# Altium PCB BAT 80 LF105-12.PcbDoc
Units mm, origin at the board's own origin, x right, y up, seen from the top; angles counter-clockwise.
Board outline 461.59 x 107.96 mm, 4 copper layers (Top Layer, Layer 1, Layer 2, Bottom Layer); 24 components, 21 nets, 103 pads, 1515 vias.
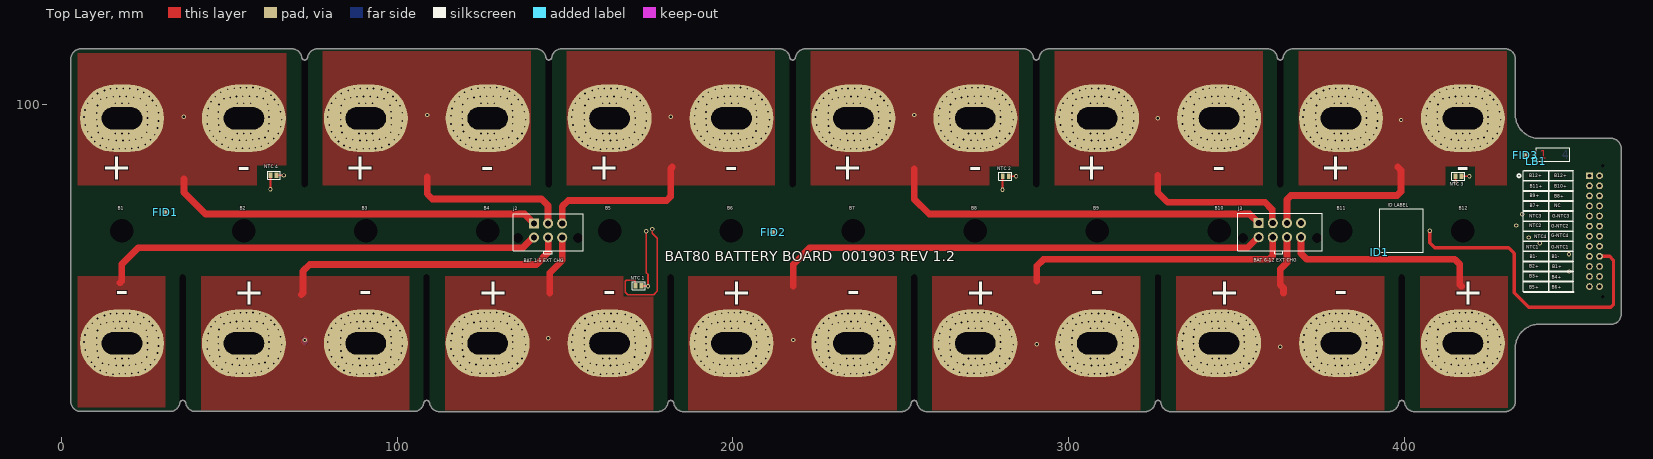
[diagram p0: Top Layer view]
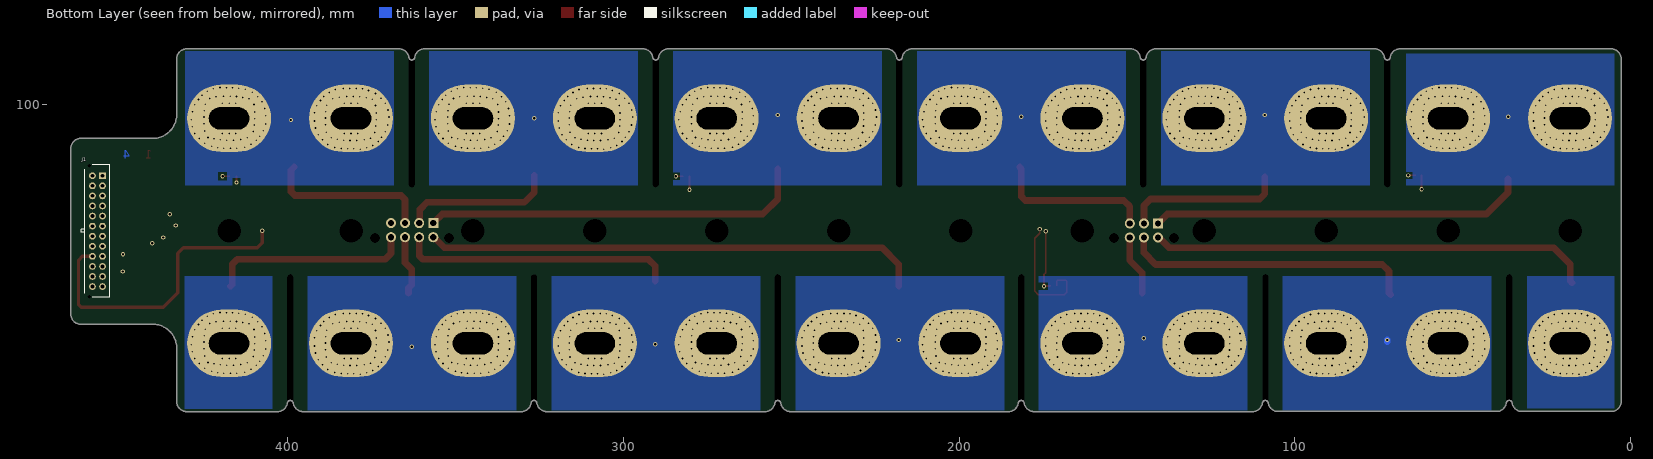
[diagram p1: Bottom Layer view, seen from below]
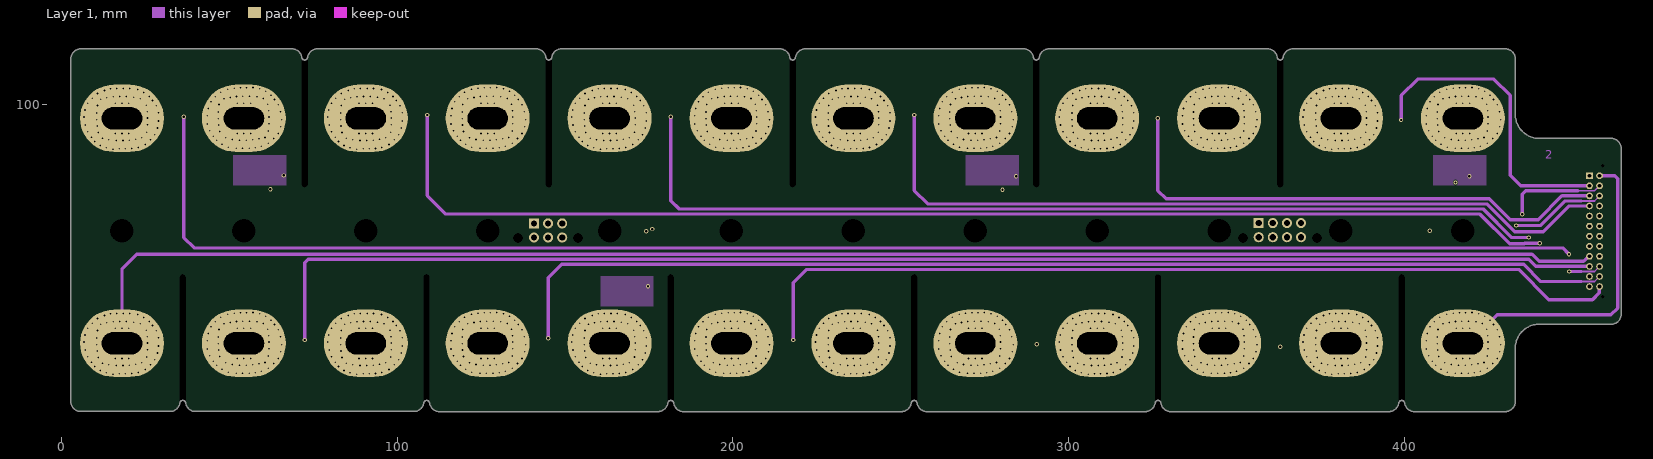
[diagram p2: Layer 1]
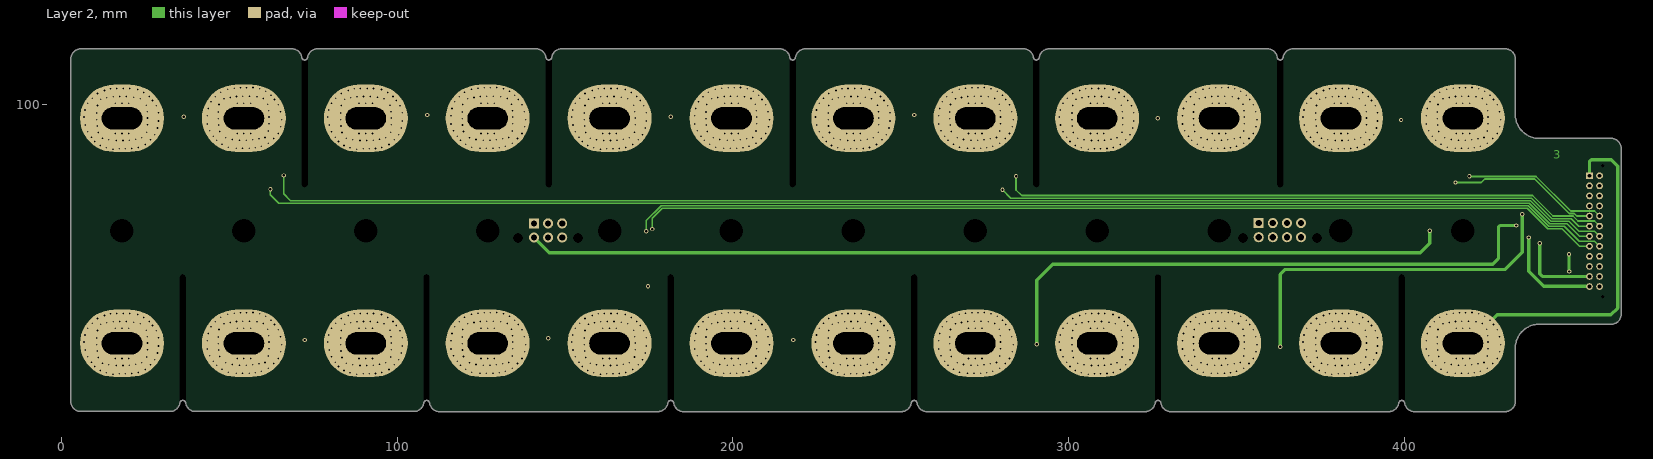
[diagram p3: Layer 2]

## Layer stack, top to bottom
Top Solder: solder mask 0.0102, Solder Resist, Dk 3.5
Top Layer: signal copper 0.14
Dielectric 2: prepreg 0.32, PP-006, Dk 4.1
Layer 1: signal copper 0.035
Dielectric 1: dielectric 0.32, FR-4, Dk 4.8
Layer 2: signal copper 0.035
Dielectric 3: prepreg 0.32, PP-006, Dk 4.1
Bottom Layer: signal copper 0.14
Bottom Solder: solder mask 0.0102, Solder Resist, Dk 3.5

## Board outline
5.45,8.7 32.8,8.7 32.806,8.706 ccw(c32.38,11.676) 35.35,11.25 cw(c36.2,11.145) 37.05,11.244 ccw(c40.02,11.67) 39.594,8.7 105.433,8.7 ccw(c105.008,11.67) 107.978,11.244 cw(c108.827,11.139) 109.678,11.238 ccw(c112.647,11.664) 112.222,8.694 178.119,8.694 178.125,8.7 ccw(c177.699,11.67) 180.669,11.244 cw(c181.519,11.139) 182.369,11.238 ccw(c185.339,11.664) 184.913,8.694 250.619,8.694 250.625,8.7 ccw(c250.199,11.67) 253.169,11.244 cw(c254.019,11.139) 254.869,11.238 ccw(c257.839,11.664) 257.413,8.694 323.219,8.694 323.225,8.7 ccw(c322.799,11.67) 325.769,11.244 cw(c326.619,11.139) 327.469,11.238 ccw(c330.439,11.664) 330.013,8.694 395.794,8.694 395.8,8.7 ccw(c395.374,11.67) 398.344,11.244 cw(c399.194,11.139) 400.044,11.238 ccw(c403.014,11.664) 402.588,8.694 430.444,8.694 430.45,8.7 ccw(c430.024,11.67) 432.994,11.244 433,11.244 433,27.5 cw(c440.2,27.5) 440.2,34.7 461.95,34.7 ccw(c461.524,37.67) 464.494,37.244 464.5,37.244 464.5,87.45 ccw(c461.53,87.024) 461.956,89.994 461.956,90 440.2,90 cw(c440.2,97.2) 433,97.2 433,97.1 433,114.1 432.994,114.1 ccw(c430.024,113.674) 430.45,116.644 430.444,116.65 366.4,116.65 ccw(c366.826,113.68) 363.856,114.106 cw(c363.006,114.211) 362.156,114.112 ccw(c359.186,113.686) 359.612,116.656 359.606,116.65 293.775,116.65 ccw(c294.201,113.68) 291.231,114.106 cw(c290.381,114.211) 289.531,114.112 ccw(c286.561,113.686) 286.987,116.656 286.981,116.65 221.2,116.65 ccw(c221.626,113.68) 218.656,114.106 cw(c217.806,114.211) 216.956,114.112 ccw(c213.986,113.686) 214.412,116.656 214.406,116.65 148.6,116.65 ccw(c149.026,113.68) 146.056,114.106 cw(c145.206,114.211) 144.356,114.112 ccw(c141.386,113.686) 141.812,116.656 141.806,116.65 75.9,116.65 ccw(c76.326,113.68) 73.356,114.106 cw(c72.506,114.211) 71.656,114.112 ccw(c68.686,113.686) 69.112,116.656 69.106,116.65 5.45,116.65 ccw(c5.876,113.68) 2.906,114.106 2.906,11.244 ccw(c5.876,11.67)

## Design rules (kind name [scope] priority, off if disabled: settings)
Clearance [All] p1: gap=0.254 ignorepadtopadclearanceinfootprint=FALSE except(0: Arc-Hole Track-Hole SMDPad-Hole THPad-Hole Via-Hole Fill-Hole Poly-Hole Region-Hole Text-Hole; 0.177: Arc-THPad Track-THPad)
ComponentClearance [All] p1: gap=0.177 collisioncheckmode=3 verticalgap=10 showdistances=FALSE
HoleSize [All] p1: absolutevalues=TRUE maxlimit=50 minlimit=0.025 maxpercent=80.000 minpercent=20.000
HoleToHoleClearance [All] p1: gap=0 allowstackedmicrovias=TRUE
NetAntennae [All] p1: netantennaetolerance=10
PolygonConnect [All] p1: connectstyle=Direct reliefconductorwidth=0.254 reliefentries=4 polygonreliefangle="90 Angle" airgapwidth=0.254
RoomDefinition "BAT 80 LF105-12" [InComponentClass('BAT 80 LF105-12')] p1: confinementstyle=ConfineOut formatcopy=TRUE lockcomponents=FALSE outline 493.4,29 561.1,29 561.1,85 493.4,85
RoutingVias [All] p1: holewidth=0.711 width=1.27 viastyle="Through Hole" minholewidth=0.711 minwidth=1.27 maxholewidth=0.711 maxwidth=1.27
SilkToSolderMaskClearance [IsPad] p1: minsilkscreentomaskgap=0.177 clearancetoexposedcopper=TRUE
SolderMaskExpansion [All] p1: expansion=0.102 istentingtop=FALSE
Width [All] p1: maxlimit=5 minlimit=0.254 preferedwidth=1
25 further rules are at their usual default settings.

## Components (designator, comment, footprint, x,y, rotation, side; value= is the part's Value field where it differs from the comment)
B1 "LIBAT" LF105 18.1,62.5 r180 top locked
B2 "LIBAT" LF105 54.4,62.5 r0 top locked
B3 "LIBAT" LF105 90.7,62.5 r180 top locked
B4 "LIBAT" LF105 127,62.5 r0 top locked
B5 "LIBAT" LF105 163.3,62.5 r180 top locked
B6 "LIBAT" LF105 199.6,62.5 r0 top locked
B7 "LIBAT" LF105 235.9,62.5 r180 top locked
B8 "LIBAT" LF105 272.2,62.5 r0 top locked
B9 "LIBAT" LF105 308.5,62.5 r180 top locked
B10 "LIBAT" LF105 344.8,62.5 r0 top locked
B11 "LIBAT" LF105 381.1,62.5 r180 top locked
B12 "LIBAT" LF105 417.4,62.5 r0 top locked
FID1 "PE PAD" FIDUCIAL 31,68 r0 top
FID2 "PE PAD" FIDUCIAL 212,62 r0 top
FID3 "PE PAD" FIDUCIAL 436,85 r0 top
ID1 "PE PAD" QR-FRAME 392.6,56.1 r0 top
J1 "43045-2412" "MICROFIT 24 VER" 455.1,78.9 r90 bottom locked
j2 "462070006" "MINIFIT JR 6 VER" 140.79,64.711 r180 top locked
J3 "462070008" "MINIFIT JR 8 VER" 356.6,64.8 r180 top locked
LB1 "PE PAD" LAYERBOX-4 439.2,83.2 r0 top
"NTC 1" "10k NTC" NTC0805-HC 171.9,46.1 r270 top locked
"NTC 2" "10k NTC" NTC0805-HC 281.25,78.75 r90 top locked
"NTC 3" "10k NTC" NTC0805-HC 416.1,78.75 r90 top locked
"NTC 4" "10k NTC" NTC0805-HC 63.25,79 r270 top locked

## Footprints (in the part's own frame and the unit in brackets; to place one, negate y for a bottom-side part, rotate by r counter-clockwise, add the part's x,y. Pads: shape width x height; smd on the part's side, far side on the other; paste and mask are expansions set on the pad)
FIDUCIAL [mm] "FIDUCIAL MARK"
  round 1.5 smd mask+0.75: 0(0,0.012)
LAYERBOX-4 [mm] "LAYER MARKER BOX 4 LAYER"
  silkscreen extent 0,0 10,4.1
LF105 [mm]
  round 0 hole 7 unplated: 0(0,0)
  oval 25x20 hole 6.6 slot 12 at 0 deg: 1(0,-33.5) 2(0,33.5)
"MICROFIT 24 VER" [mm]
  round 0 hole 1.1 unplated: 0(-36,3.94) 0(3,3.94)
  rect 2x2 hole 1.1: 1(0,0)
  round 2 hole 1.1: 2(-3,0) 3(-6,0) 4(-9,0) 5(-12,0) 6(-15,0) 7(-18,0) 8(-21,0) 9(-24,0) 10(-27,0) 11(-30,0) 12(-33,0) 13(0,3) 14(-3,3) 15(-6,3) 16(-9,3) 17(-12,3) 18(-15,3) 19(-18,3) 20(-21,3) 21(-24,3) 22(-27,3) 23(-30,3) 24(-33,3)
  silkscreen extent -36.25,-2.2 3.33,6.35, body extent -36.58,-2.44 3.57,6.33, height 10.15
"MINIFIT JR 6 VER" [mm] "462070006"
  round 0 hole 3 unplated: 0(-13.11,4.391) 0(4.7,4.391)
  rect 3x3 hole 1.85: 1(0,0)
  round 3 hole 1.85: 2(-4.2,0) 3(-8.4,0) 4(-0.01,4.211) 5(-4.21,4.211) 6(-8.41,4.211)
  silkscreen extent -14.6,-2.8 6.2,9, body extent -14.63,-2.8 6.23,8.2, height 13.8
"MINIFIT JR 8 VER" [mm] "462070008"
  round 0 hole 3 unplated: 0(-17.31,4.391) 0(4.7,4.391)
  rect 3x3 hole 1.85: 1(0,0)
  round 3 hole 1.85: 2(-4.2,0) 3(-8.4,0) 4(-12.6,0) 5(-0.01,4.211) 6(-4.21,4.211) 7(-8.41,4.211) 8(-12.61,4.211)
  silkscreen extent -18.9,-3 6.2,9.1, body extent -18.83,-2.8 6.23,8.2, height 13.8
NTC0805-HC [mm] "HEAVY COPPER FOOTPRINT"
  rect 1.67x1.12 smd paste-0.1 mask-0.1: 1(0,-0.9) 2(0,0.9)
  silkscreen extent -1.2,-1.8 1.2,2, body extent -0.8,-1.05 0.8,1.05, height 1
QR-FRAME [mm]
  round 0 on Top Overlay: 1(0,0)
  silkscreen extent 0,0 13,13

## Part data
B1 B2 B3 B4 B5 B6 B7 B8 B9 B10 B11 B12: library part LI-BATTERY, "LF 105"
J1: library part "Header 12X2A", "MOLEX 43045-2412", Supplier Part Number 1=6700573, LatestRevisionDate=17-Jul-2002, LatestRevisionNote="Re-released for DXP Platform.", Publisher="Altium Limited", Supplier 1=RSComponents
j2: library part "Header 3X2A", "MOLEX 46207-0006", LatestRevisionDate=17-Jul-2002, LatestRevisionNote="Re-released for DXP Platform.", Publisher="Altium Limited"
J3: library part "Header 4X2A", "MOLEX  46207-0008", LatestRevisionDate=17-Jul-2002, LatestRevisionNote="Re-released for DXP Platform.", Publisher="Altium Limited"
"NTC 1" "NTC 2" "NTC 3" "NTC 4": library part "Res Thermal", "Vishay NTCS0805E3103FLT", LatestRevisionDate=04-Mar-2005, LatestRevisionNote="PCB Footprint replaced.", PackageReference=6-0805, Published=24-Mar-1999, Publisher="Altium Limited"

## Free pads (board coordinates)
  round 0 hole 1.75 slot 42 at 90 deg unplated: 0(36.2,28.5) 0(72.5,96.5) 0(108.8,28.5) 0(145.2,96.5) 0(181.5,28.5) 0(217.8,96.5) 0(254,28.5) 0(290.4,96.5) 0(326.6,28.5) 0(363,96.5) 0(399.2,28.5)

## Via types
v1: diameter 1, hole 0.5, Top Layer to Bottom Layer, 1488 vias
v2: diameter 1.27, hole 0.711, Top Layer to Bottom Layer, 27 vias

## Nets (pads, with @x,y where several pads share a name; then routed paths per layer and width w, separated by ;. In a path a pad name is that pad's centre, name@x,y a point inside that pad or via, vN(x,y) a via of type N, cw(c..) or ccw(c..) an arc to the next point about the centre after c; other vN are vias at no path point)
B1+: B1.1 B2.2 J1.22 j2.1 | length 577.5
  Top Layer w2: 36.5,78 36.561,77.939 36.561,73.939 43,67.5 138.001,67.5 j2.1
  Layer 1 w0.5: 452.7,50.4 456.6,50.4 J1.22
  Layer 1 w1: v2(36.5,96.5) 36.5,60.5 39.6,57.4 447.1,57.4 v2(449,55.5) ; v2(449.1,50.4) 452.7,50.4
  Layer 2 w1: v2(449,55.5) 449,50.573 449.1,50.473 v2(449.1,50.4)
  other v1: 15.4,86.8 17.3,86.9 19.1,86.9 21,87 52.1,87.1 54,87.1 56,87.1 13.4,87.2 57.811,87.198 22.9,87.3 49.7,87.4 59.6,87.7 11.6,87.9 25,88.2 47.9,88.3 61.7,88.6 10,89.1 16.4,89.4 18.4,89.4 20.3,89.5 46.3,89.5 53.1,89.5 55.1,89.5 14.2,89.6 26.6,89.6 57,89.6 50.9,89.7 22.2,89.8 58.9,89.9 63.3,90 12.3,90.1 24,90.2 49,90.2 60.7,90.3 9,90.4 45.3,90.7 27.9,91.1 16.1,91.5 18.1,91.5 20.1,91.5 52.4,91.5 54.4,91.5 56.4,91.5 64.6,91.5 11,91.8 25.5,91.9 7.9,92 47.2,92.1 61.7,92.2 44.2,92.3 28.7,93.1 65.4,93.5 10.7,93.7 7.2,94 46.9,94 25.7,94.1 43.5,94.3 61.9,94.4 29,95.2 10.6,95.6 65.7,95.6 46.8,95.9 25.7,96.1 6.8,96.4 61.9,96.4 43.5,96.8 10.6,97.6 29,97.7 46.8,97.9 25.6,98 65.3,98 61.8,98.3 7.1,98.5 43.8,98.9 28.3,99.7 10.8,99.8 25.3,99.9 64.6,100 47,100.1 61.5,100.2 7.9,100.5 16.1,100.5 18.1,100.5 20.1,100.5 52.4,100.5 54.4,100.5 56.4,100.5 44.6,100.9 27.2,101.3 63.5,101.6 11.8,101.7 23.5,101.8 48.5,101.8 60.2,101.9 9.2,102 13.6,102.1 50.3,102.2 21.6,102.3 15.5,102.4 45.9,102.4 58.3,102.4 17.4,102.5 19.4,102.5 26.2,102.5 52.2,102.5 54.1,102.6 56.1,102.6 62.5,102.9 10.8,103.4 24.6,103.7 47.5,103.8 60.9,104.1 12.9,104.3 22.8,104.6 49.6,104.7 14.689,104.802 59.1,104.8 16.5,104.9 18.5,104.9 20.4,104.9 51.5,105 53.4,105.1 55.2,105.1 57.1,105.2
B1-: B1.2 J1.9 J1.21 j2.4 | length 959
  Top Layer w1: v2(407.5,62.5) 407.5,59 409,57.5 431,57.5 432.75,55.75 432.75,44 437,39.75 461.5,39.75 462.25,40.5 462.25,53.75 461.1,54.9 J1.21
  Top Layer w2: 17.5,47 18,47.5 18,52.5 23,57.5 137.529,57.5 140.529,60.5 j2.4
  Layer 1 w1: B1.2 v1(18.1,33.5) 18.1,51.1 22.5,55.5 438,55.5 440.1,53.4 453.329,53.4 454.829,54.9 J1.9
  Layer 2 w1: j2.4 145.3,56 404.75,56 407.5,58.75 v2(407.5,62.5)
  other v1: 15.4,19.8 17.3,19.9 19.1,19.9 21,20 13.4,20.2 22.9,20.3 11.6,20.9 25,21.2 10,22.1 16.4,22.4 18.4,22.4 20.3,22.5 14.2,22.6 26.6,22.6 22.2,22.8 12.3,23.1 24,23.2 9,23.4 27.9,24.1 16.1,24.5 18.1,24.5 20.1,24.5 11,24.8 25.5,24.9 7.9,25 28.7,26.1 10.7,26.7 7.2,27 25.7,27.1 29,28.2 10.6,28.6 25.7,29.1 6.8,29.4 10.6,30.6 29,30.7 25.6,31 7.1,31.5 28.3,32.7 10.8,32.8 25.3,32.9 7.9,33.5 16.1,33.5 20.1,33.5 27.2,34.3 11.8,34.7 23.5,34.8 9.2,35 13.6,35.1 21.6,35.3 15.5,35.4 17.4,35.5 19.4,35.5 26.2,35.5 10.8,36.4 24.6,36.7 12.9,37.3 22.8,37.6 14.689,37.802 16.5,37.9 18.5,37.9 20.4,37.9
B2+: B2.1 B3.2 J1.10 j2.5 | length 494.4
  Top Layer w2: 71.5,43.5 72,44 72,50.5 74,52.5 141.5,52.5 145,56 j2.5
  Layer 1 w1: v2(72.5,30) 72.5,53 73.5,54 437,54 439.1,51.9 J1.10
  Bottom Layer w2: v2@72.5,29.5 v2(72.5,30)
  other v1: 88,19.8 89.9,19.9 91.7,19.9 93.6,20 52.1,20.1 54,20.1 56,20.1 57.811,20.198 86,20.2 95.5,20.3 49.7,20.4 59.6,20.7 84.2,20.9 97.6,21.2 47.9,21.3 61.7,21.6 82.6,22.1 89,22.4 91,22.4 46.3,22.5 53.1,22.5 55.1,22.5 92.9,22.5 57,22.6 86.8,22.6 99.2,22.6 50.9,22.7 94.8,22.8 58.9,22.9 63.3,23 84.9,23.1 49,23.2 96.6,23.2 60.7,23.3 81.6,23.4 45.3,23.7 100.5,24.1 52.4,24.5 54.4,24.5 56.4,24.5 64.6,24.5 88.7,24.5 90.7,24.5 92.7,24.5 83.6,24.8 98.1,24.9 80.5,25 47.2,25.1 61.7,25.2 44.2,25.3 101.3,26.1 65.4,26.5 83.3,26.7 46.9,27 79.8,27 98.3,27.1 43.5,27.3 61.9,27.4 101.6,28.2 65.7,28.6 83.2,28.6 46.8,28.9 98.3,29.1 61.9,29.4 79.4,29.4 43.5,29.8 83.2,30.6 101.6,30.7 46.8,30.9 65.3,31 98.2,31 61.8,31.3 79.7,31.5 43.8,31.9 100.9,32.7 83.4,32.8 97.9,32.9 64.6,33 47,33.1 61.5,33.2 52.4,33.5 54.4,33.5 56.4,33.5 80.5,33.5 88.7,33.5 90.7,33.5 92.7,33.5 44.6,33.9 99.8,34.3 63.5,34.6 84.4,34.7 48.5,34.8 96.1,34.8 60.2,34.9 81.8,35 86.2,35.1 50.3,35.2 94.2,35.3 45.9,35.4 58.3,35.4 88.1,35.4 52.2,35.5 90,35.5 92,35.5 98.8,35.5 54.1,35.6 56.1,35.6 62.5,35.9 83.4,36.4 97.2,36.7 47.5,36.8 60.9,37.1 85.5,37.3 95.4,37.6 49.6,37.7 59.1,37.8 87.289,37.802 89.1,37.9 91.1,37.9 93,37.9 51.5,38 53.4,38.1 55.2,38.1 57.1,38.2
B3+: B3.1 B4.2 J1.11 j2.2 | length 433.2
  Top Layer w2: 109,78.5 109,73.5 110.5,72 143,72 144.99,70.01 j2.2
  Layer 1 w1: v2(109,97) 109,73 114.5,67.5 422.5,67.5 431.3,58.7 435.719,58.7 435.808,58.789 v2(440.3,58.789)
  Layer 2 w1: v2(440.3,58.789) 440.3,49.7 441.1,48.9 J1.11
  other v1: 88,86.8 89.9,86.9 91.7,86.9 93.6,87 124.7,87.1 126.6,87.1 128.6,87.1 86,87.2 130.411,87.198 95.5,87.3 122.3,87.4 132.2,87.7 84.2,87.9 97.6,88.2 120.5,88.3 134.3,88.6 82.6,89.1 89,89.4 91,89.4 92.9,89.5 118.9,89.5 125.7,89.5 127.7,89.5 86.8,89.6 99.2,89.6 129.6,89.6 123.5,89.7 94.8,89.8 131.5,89.9 135.9,90 84.9,90.1 96.6,90.2 121.6,90.2 133.3,90.3 81.6,90.4 117.9,90.7 100.5,91.1 88.7,91.5 90.7,91.5 92.7,91.5 125,91.5 127,91.5 129,91.5 137.2,91.5 83.6,91.8 98.1,91.9 80.5,92 119.8,92.1 134.3,92.2 116.8,92.3 101.3,93.1 138,93.5 83.3,93.7 79.8,94 119.5,94 98.3,94.1 116.1,94.3 134.5,94.4 101.6,95.2 83.2,95.6 138.3,95.6 119.4,95.9 98.3,96.1 79.4,96.4 134.5,96.4 116.1,96.8 83.2,97.6 101.6,97.7 119.4,97.9 98.2,98 137.9,98 134.4,98.3 79.7,98.5 116.4,98.9 100.9,99.7 83.4,99.8 97.9,99.9 137.2,100 119.6,100.1 134.1,100.2 80.5,100.5 88.7,100.5 90.7,100.5 92.7,100.5 125,100.5 127,100.5 129,100.5 117.2,100.9 99.8,101.3 136.1,101.6 84.4,101.7 96.1,101.8 121.1,101.8 132.8,101.9 81.8,102 86.2,102.1 122.9,102.2 94.2,102.3 88.1,102.4 118.5,102.4 130.9,102.4 90,102.5 92,102.5 98.8,102.5 124.8,102.5 126.7,102.6 128.7,102.6 135.1,102.9 83.4,103.4 97.2,103.7 120.1,103.8 133.5,104.1 85.5,104.3 95.4,104.6 122.2,104.7 87.289,104.802 131.7,104.8 89.1,104.9 91.1,104.9 93,104.9 124.1,105 126,105.1 127.8,105.1 129.7,105.2
B4+: B4.1 B5.2 J1.23 j2.6 | length 353.5
  Top Layer w2: 145.5,44 145.5,50 149.2,53.7 j2.6
  Layer 1 w0.5: 452.7,47.4 456.6,47.4 J1.23
  Layer 1 w1: v2(145,30.5) 145,48.5 149,52.5 435.5,52.5 440.6,47.4 452.7,47.4
  other v1: 160.6,19.8 162.5,19.9 164.3,19.9 166.2,20 124.7,20.1 126.6,20.1 128.6,20.1 130.411,20.198 158.6,20.2 168.1,20.3 122.3,20.4 132.2,20.7 156.8,20.9 170.2,21.2 120.5,21.3 134.3,21.6 155.2,22.1 161.6,22.4 163.6,22.4 118.9,22.5 125.7,22.5 127.7,22.5 165.5,22.5 129.6,22.6 159.4,22.6 171.8,22.6 123.5,22.7 167.4,22.8 131.5,22.9 135.9,23 157.5,23.1 121.6,23.2 169.2,23.2 133.3,23.3 154.2,23.4 117.9,23.7 173.1,24.1 125,24.5 127,24.5 129,24.5 137.2,24.5 161.3,24.5 163.3,24.5 165.3,24.5 156.2,24.8 170.7,24.9 153.1,25 119.8,25.1 134.3,25.2 116.8,25.3 173.9,26.1 138,26.5 155.9,26.7 119.5,27 152.4,27 170.9,27.1 116.1,27.3 134.5,27.4 174.2,28.2 138.3,28.6 155.8,28.6 119.4,28.9 170.9,29.1 134.5,29.4 152,29.4 116.1,29.8 155.8,30.6 174.2,30.7 119.4,30.9 137.9,31 170.8,31 134.4,31.3 152.3,31.5 116.4,31.9 173.5,32.7 156,32.8 170.5,32.9 137.2,33 119.6,33.1 134.1,33.2 125,33.5 127,33.5 129,33.5 153.1,33.5 161.3,33.5 163.3,33.5 165.3,33.5 117.2,33.9 172.4,34.3 136.1,34.6 157,34.7 121.1,34.8 168.7,34.8 132.8,34.9 154.4,35 158.8,35.1 122.9,35.2 166.8,35.3 118.5,35.4 130.9,35.4 160.7,35.4 124.8,35.5 162.6,35.5 164.6,35.5 171.4,35.5 126.7,35.6 128.7,35.6 135.1,35.9 156,36.4 169.8,36.7 120.1,36.8 133.5,37.1 158.1,37.3 168,37.6 122.2,37.7 131.7,37.8 159.889,37.802 161.7,37.9 163.7,37.9 165.6,37.9 124.1,38 126,38.1 127.8,38.1 129.7,38.2
B5+: B5.1 B6.2 J1.12 j2.3 | length 362.6
  Top Layer w2: j2.3 149.19,69.69 151,71.5 180.328,71.5 181.5,72.672 181.5,81 182,81.5
  Layer 1 w1: v2(181.5,96.5) 181.5,71.5 184,69 423.5,69 432,60.5 v2(437,60.5)
  Layer 2 w1: v2(437,60.5) 437,50.5 441.5,46 455,46 J1.12
  other v1: 160.6,86.8 162.5,86.9 164.3,86.9 166.2,87 197.3,87.1 199.2,87.1 201.2,87.1 158.6,87.2 203.011,87.198 168.1,87.3 194.9,87.4 204.8,87.7 156.8,87.9 170.2,88.2 193.1,88.3 206.9,88.6 155.2,89.1 161.6,89.4 163.6,89.4 165.5,89.5 191.5,89.5 198.3,89.5 200.3,89.5 159.4,89.6 171.8,89.6 202.2,89.6 196.1,89.7 167.4,89.8 204.1,89.9 208.5,90 157.5,90.1 169.2,90.2 194.2,90.2 205.9,90.3 154.2,90.4 190.5,90.7 173.1,91.1 161.3,91.5 163.3,91.5 165.3,91.5 197.6,91.5 199.6,91.5 201.6,91.5 209.8,91.5 156.2,91.8 170.7,91.9 153.1,92 192.4,92.1 206.9,92.2 189.4,92.3 173.9,93.1 210.6,93.5 155.9,93.7 152.4,94 192.1,94 170.9,94.1 188.7,94.3 207.1,94.4 174.2,95.2 155.8,95.6 210.9,95.6 192,95.9 170.9,96.1 152,96.4 207.1,96.4 188.7,96.8 155.8,97.6 174.2,97.7 192,97.9 170.8,98 210.5,98 207,98.3 152.3,98.5 189,98.9 173.5,99.7 156,99.8 170.5,99.9 209.8,100 192.2,100.1 206.7,100.2 153.1,100.5 161.3,100.5 163.3,100.5 165.3,100.5 197.6,100.5 199.6,100.5 201.6,100.5 189.8,100.9 172.4,101.3 208.7,101.6 157,101.7 168.7,101.8 193.7,101.8 205.4,101.9 154.4,102 158.8,102.1 195.5,102.2 166.8,102.3 160.7,102.4 191.1,102.4 203.5,102.4 162.6,102.5 164.6,102.5 171.4,102.5 197.4,102.5 199.3,102.6 201.3,102.6 207.7,102.9 156,103.4 169.8,103.7 192.7,103.8 206.1,104.1 158.1,104.3 168,104.6 194.8,104.7 159.889,104.802 204.3,104.8 161.7,104.9 163.7,104.9 165.6,104.9 196.7,105 198.6,105.1 200.4,105.1 202.3,105.2
B6+: B6.1 B7.2 J1.24 J3.5 | length 413.6
  Top Layer w2: 218,46 218,52.5 223,57.5 353.335,57.5 356.425,60.589 J3.5
  Layer 1 w1: v2(218,30) 218,47 222,51 434,51 443,42 456,42 458,44 458,45.8 J1.24
  other v1: 233.2,19.8 235.1,19.9 236.9,19.9 238.8,20 197.3,20.1 199.2,20.1 201.2,20.1 203.011,20.198 231.2,20.2 240.7,20.3 194.9,20.4 204.8,20.7 229.4,20.9 242.8,21.2 193.1,21.3 206.9,21.6 227.8,22.1 234.2,22.4 236.2,22.4 191.5,22.5 198.3,22.5 200.3,22.5 238.1,22.5 202.2,22.6 232,22.6 244.4,22.6 196.1,22.7 240,22.8 204.1,22.9 208.5,23 230.1,23.1 194.2,23.2 241.8,23.2 205.9,23.3 226.8,23.4 190.5,23.7 245.7,24.1 197.6,24.5 199.6,24.5 201.6,24.5 209.8,24.5 233.9,24.5 235.9,24.5 237.9,24.5 228.8,24.8 243.3,24.9 225.7,25 192.4,25.1 206.9,25.2 189.4,25.3 246.5,26.1 210.6,26.5 228.5,26.7 192.1,27 225,27 243.5,27.1 188.7,27.3 207.1,27.4 246.8,28.2 210.9,28.6 228.4,28.6 192,28.9 243.5,29.1 207.1,29.4 224.6,29.4 188.7,29.8 228.4,30.6 246.8,30.7 192,30.9 210.5,31 243.4,31 207,31.3 224.9,31.5 189,31.9 246.1,32.7 228.6,32.8 243.1,32.9 209.8,33 192.2,33.1 206.7,33.2 197.6,33.5 199.6,33.5 201.6,33.5 225.7,33.5 233.9,33.5 235.9,33.5 237.9,33.5 189.8,33.9 245,34.3 208.7,34.6 229.6,34.7 193.7,34.8 241.3,34.8 205.4,34.9 227,35 231.4,35.1 195.5,35.2 239.4,35.3 191.1,35.4 203.5,35.4 233.3,35.4 197.4,35.5 235.2,35.5 237.2,35.5 244,35.5 199.3,35.6 201.3,35.6 207.7,35.9 228.6,36.4 242.4,36.7 192.7,36.8 206.1,37.1 230.7,37.3 240.6,37.6 194.8,37.7 204.3,37.8 232.489,37.802 234.3,37.9 236.3,37.9 238.2,37.9 196.7,38 198.6,38.1 200.4,38.1 202.3,38.2
B7+: B7.1 B8.2 J1.4 J3.1 | length 346.5
  Top Layer w2: 254,81 254,72 258.5,67.5 353.9,67.5 J3.1
  Layer 1 w1: v2(254,97) 254,74.5 258,70.5 424.5,70.5 432.8,62.2 441.4,62.2 449.1,69.9 J1.4
  other v1: 233.2,86.8 235.1,86.9 236.9,86.9 238.8,87 269.9,87.1 271.8,87.1 273.8,87.1 231.2,87.2 275.611,87.198 240.7,87.3 267.5,87.4 277.4,87.7 229.4,87.9 242.8,88.2 265.7,88.3 279.5,88.6 227.8,89.1 234.2,89.4 236.2,89.4 238.1,89.5 264.1,89.5 270.9,89.5 272.9,89.5 232,89.6 244.4,89.6 274.8,89.6 268.7,89.7 240,89.8 276.7,89.9 281.1,90 230.1,90.1 241.8,90.2 266.8,90.2 278.5,90.3 226.8,90.4 263.1,90.7 245.7,91.1 233.9,91.5 235.9,91.5 237.9,91.5 270.2,91.5 272.2,91.5 274.2,91.5 282.4,91.5 228.8,91.8 243.3,91.9 225.7,92 265,92.1 279.5,92.2 262,92.3 246.5,93.1 283.2,93.5 228.5,93.7 225,94 264.7,94 243.5,94.1 261.3,94.3 279.7,94.4 246.8,95.2 228.4,95.6 283.5,95.6 264.6,95.9 243.5,96.1 224.6,96.4 279.7,96.4 261.3,96.8 228.4,97.6 246.8,97.7 264.6,97.9 243.4,98 283.1,98 279.6,98.3 224.9,98.5 261.6,98.9 246.1,99.7 228.6,99.8 243.1,99.9 282.4,100 264.8,100.1 279.3,100.2 225.7,100.5 233.9,100.5 235.9,100.5 237.9,100.5 270.2,100.5 272.2,100.5 274.2,100.5 262.4,100.9 245,101.3 281.3,101.6 229.6,101.7 241.3,101.8 266.3,101.8 278,101.9 227,102 231.4,102.1 268.1,102.2 239.4,102.3 233.3,102.4 263.7,102.4 276.1,102.4 235.2,102.5 237.2,102.5 244,102.5 270,102.5 271.9,102.6 273.9,102.6 280.3,102.9 228.6,103.4 242.4,103.7 265.3,103.8 278.7,104.1 230.7,104.3 240.6,104.6 267.4,104.7 232.489,104.802 276.9,104.8 234.3,104.9 236.3,104.9 238.2,104.9 269.3,105 271.2,105.1 273,105.1 274.9,105.2
B8+: B8.1 B9.2 J1.15 J3.6 | length 284
  Top Layer w2: 290.5,47.5 290.5,52 292.5,54 359.638,54 360.81,55.172 J3.6
  Layer 1 w0.5: 452.7,71.4 456.6,71.4 J1.15
  Layer 1 w1: v2(433.3,64.1) 440.6,64.1 447.9,71.4 452.7,71.4
  Layer 2 w1: v2(290.5,28.75) 290.5,47.75 295.25,52.5 426.25,52.5 428,54.25 428,63.514 428.586,64.1 v2(433.3,64.1)
  other v1: 305.8,19.8 307.7,19.9 309.5,19.9 311.4,20 269.9,20.1 271.8,20.1 273.8,20.1 275.611,20.198 303.8,20.2 313.3,20.3 267.5,20.4 277.4,20.7 302,20.9 315.4,21.2 265.7,21.3 279.5,21.6 300.4,22.1 306.8,22.4 308.8,22.4 264.1,22.5 270.9,22.5 272.9,22.5 310.7,22.5 274.8,22.6 304.6,22.6 317,22.6 268.7,22.7 312.6,22.8 276.7,22.9 281.1,23 302.7,23.1 266.8,23.2 314.4,23.2 278.5,23.3 299.4,23.4 263.1,23.7 318.3,24.1 270.2,24.5 272.2,24.5 274.2,24.5 282.4,24.5 306.5,24.5 308.5,24.5 310.5,24.5 301.4,24.8 315.9,24.9 298.3,25 265,25.1 279.5,25.2 262,25.3 319.1,26.1 283.2,26.5 301.1,26.7 264.7,27 297.6,27 316.1,27.1 261.3,27.3 279.7,27.4 319.4,28.2 283.5,28.6 301,28.6 264.6,28.9 316.1,29.1 279.7,29.4 297.2,29.4 261.3,29.8 301,30.6 319.4,30.7 264.6,30.9 283.1,31 316,31 279.6,31.3 297.5,31.5 261.6,31.9 318.7,32.7 301.2,32.8 315.7,32.9 282.4,33 264.8,33.1 279.3,33.2 270.2,33.5 272.2,33.5 274.2,33.5 298.3,33.5 306.5,33.5 308.5,33.5 310.5,33.5 262.4,33.9 317.6,34.3 281.3,34.6 302.2,34.7 266.3,34.8 313.9,34.8 278,34.9 299.6,35 304,35.1 268.1,35.2 312,35.3 263.7,35.4 276.1,35.4 305.9,35.4 270,35.5 307.8,35.5 309.8,35.5 316.6,35.5 271.9,35.6 273.9,35.6 280.3,35.9 301.2,36.4 315,36.7 265.3,36.8 278.7,37.1 303.3,37.3 313.2,37.6 267.4,37.7 276.9,37.8 305.089,37.802 306.9,37.9 308.9,37.9 310.8,37.9 269.3,38 271.2,38.1 273,38.1 274.9,38.2
B9+: B9.1 B10.2 J1.3 J3.2 | length 202
  Top Layer w2: 326.5,79 326.5,74 329.5,71 358.5,71 360.609,68.891 360.609,64.991 J3.2
  Layer 1 w1: v2(326.5,96) 326.5,74.5 329,72 425.25,72 431.45,65.8 439.8,65.8 446.9,72.9 J1.3
  other v1: 305.8,86.8 307.7,86.9 309.5,86.9 311.4,87 342.5,87.1 344.4,87.1 346.4,87.1 303.8,87.2 348.211,87.198 313.3,87.3 340.1,87.4 350,87.7 302,87.9 315.4,88.2 338.3,88.3 352.1,88.6 300.4,89.1 306.8,89.4 308.8,89.4 310.7,89.5 336.7,89.5 343.5,89.5 345.5,89.5 304.6,89.6 317,89.6 347.4,89.6 341.3,89.7 312.6,89.8 349.3,89.9 353.7,90 302.7,90.1 314.4,90.2 339.4,90.2 351.1,90.3 299.4,90.4 335.7,90.7 318.3,91.1 306.5,91.5 308.5,91.5 310.5,91.5 342.8,91.5 344.8,91.5 346.8,91.5 355,91.5 301.4,91.8 315.9,91.9 298.3,92 337.6,92.1 352.1,92.2 334.6,92.3 319.1,93.1 355.8,93.5 301.1,93.7 297.6,94 337.3,94 316.1,94.1 333.9,94.3 352.3,94.4 319.4,95.2 301,95.6 356.1,95.6 337.2,95.9 316.1,96.1 297.2,96.4 352.3,96.4 333.9,96.8 301,97.6 319.4,97.7 337.2,97.9 316,98 355.7,98 352.2,98.3 297.5,98.5 334.2,98.9 318.7,99.7 301.2,99.8 315.7,99.9 355,100 337.4,100.1 351.9,100.2 298.3,100.5 306.5,100.5 308.5,100.5 310.5,100.5 342.8,100.5 344.8,100.5 346.8,100.5 335,100.9 317.6,101.3 353.9,101.6 302.2,101.7 313.9,101.8 338.9,101.8 350.6,101.9 299.6,102 304,102.1 340.7,102.2 312,102.3 305.9,102.4 336.3,102.4 348.7,102.4 307.8,102.5 309.8,102.5 316.6,102.5 342.6,102.5 344.5,102.6 346.5,102.6 352.9,102.9 301.2,103.4 315,103.7 337.9,103.8 351.3,104.1 303.3,104.3 313.2,104.6 340,104.7 305.089,104.802 349.5,104.8 306.9,104.9 308.9,104.9 310.8,104.9 341.9,105 343.8,105.1 345.6,105.1 347.5,105.2
B10+: B10.1 B11.2 J1.14 J3.7 | length 155.5
  Top Layer w2: 364,44 364,45.5 363,46.5 363,51 365.01,53.01 J3.7
  Layer 1 w0.5: 451.6,74.4 456.6,74.4 J1.14
  Layer 1 w1: v2(435.1,67.4) 435.1,73.35 436.15,74.4 451.6,74.4
  Layer 2 w1: v2(363,28) 363,49.5 364.5,51 430,51 435.1,56.1 v2(435.1,67.4)
  other v1: 378.4,19.8 380.3,19.9 382.1,19.9 384,20 342.5,20.1 344.4,20.1 346.4,20.1 348.211,20.198 376.4,20.2 385.9,20.3 340.1,20.4 350,20.7 374.6,20.9 388,21.2 338.3,21.3 352.1,21.6 373,22.1 379.4,22.4 381.4,22.4 336.7,22.5 343.5,22.5 345.5,22.5 383.3,22.5 347.4,22.6 377.2,22.6 389.6,22.6 341.3,22.7 385.2,22.8 349.3,22.9 353.7,23 375.3,23.1 339.4,23.2 387,23.2 351.1,23.3 372,23.4 335.7,23.7 390.9,24.1 342.8,24.5 344.8,24.5 346.8,24.5 355,24.5 379.1,24.5 381.1,24.5 383.1,24.5 374,24.8 388.5,24.9 370.9,25 337.6,25.1 352.1,25.2 334.6,25.3 391.7,26.1 355.8,26.5 373.7,26.7 337.3,27 370.2,27 388.7,27.1 333.9,27.3 352.3,27.4 392,28.2 356.1,28.6 373.6,28.6 337.2,28.9 388.7,29.1 352.3,29.4 369.8,29.4 333.9,29.8 373.6,30.6 392,30.7 337.2,30.9 355.7,31 388.6,31 352.2,31.3 370.1,31.5 334.2,31.9 391.3,32.7 373.8,32.8 388.3,32.9 355,33 337.4,33.1 351.9,33.2 342.8,33.5 344.8,33.5 346.8,33.5 370.9,33.5 379.1,33.5 381.1,33.5 383.1,33.5 335,33.9 390.2,34.3 353.9,34.6 374.8,34.7 338.9,34.8 386.5,34.8 350.6,34.9 372.2,35 376.6,35.1 340.7,35.2 384.6,35.3 336.3,35.4 348.7,35.4 378.5,35.4 342.6,35.5 380.4,35.5 382.4,35.5 389.2,35.5 344.5,35.6 346.5,35.6 352.9,35.9 373.8,36.4 387.6,36.7 337.9,36.8 351.3,37.1 375.9,37.3 385.8,37.6 340,37.7 349.5,37.8 377.689,37.802 379.5,37.9 381.5,37.9 383.4,37.9 341.9,38 343.8,38.1 345.6,38.1 347.5,38.2
B11+: B11.1 B12.2 J1.2 J3.3 | length 142.3
  Top Layer w2: J3.3 365,71.828 366.172,73 397.828,73 399,74.172 399,80.5 398,81.5
  Layer 1 w1: v2(399,95.5) 399,102.8 403.9,107.7 426.6,107.7 431.5,102.8 431.5,79 434.6,75.9 J1.2
  other v1: 378.4,86.8 380.3,86.9 382.1,86.9 384,87 415.1,87.1 417,87.1 419,87.1 376.4,87.2 420.811,87.198 385.9,87.3 412.7,87.4 422.6,87.7 374.6,87.9 388,88.2 410.9,88.3 424.7,88.6 373,89.1 379.4,89.4 381.4,89.4 383.3,89.5 409.3,89.5 416.1,89.5 418.1,89.5 377.2,89.6 389.6,89.6 420,89.6 413.9,89.7 385.2,89.8 421.9,89.9 426.3,90 375.3,90.1 387,90.2 412,90.2 423.7,90.3 372,90.4 408.3,90.7 390.9,91.1 379.1,91.5 381.1,91.5 383.1,91.5 415.4,91.5 417.4,91.5 419.4,91.5 427.6,91.5 374,91.8 388.5,91.9 370.9,92 410.2,92.1 424.7,92.2 407.2,92.3 391.7,93.1 428.4,93.5 373.7,93.7 370.2,94 409.9,94 388.7,94.1 406.5,94.3 424.9,94.4 392,95.2 373.6,95.6 428.7,95.6 409.8,95.9 388.7,96.1 369.8,96.4 424.9,96.4 406.5,96.8 373.6,97.6 392,97.7 409.8,97.9 388.6,98 428.3,98 424.8,98.3 370.1,98.5 406.8,98.9 391.3,99.7 373.8,99.8 388.3,99.9 427.6,100 410,100.1 424.5,100.2 370.9,100.5 379.1,100.5 381.1,100.5 383.1,100.5 415.4,100.5 417.4,100.5 419.4,100.5 407.6,100.9 390.2,101.3 426.5,101.6 374.8,101.7 386.5,101.8 411.5,101.8 423.2,101.9 372.2,102 376.6,102.1 413.3,102.2 384.6,102.3 378.5,102.4 408.9,102.4 421.3,102.4 380.4,102.5 382.4,102.5 389.2,102.5 415.2,102.5 417.1,102.6 419.1,102.6 425.5,102.9 373.8,103.4 387.6,103.7 410.5,103.8 423.9,104.1 375.9,104.3 385.8,104.6 412.6,104.7 377.689,104.802 422.1,104.8 379.5,104.9 381.5,104.9 383.4,104.9 414.5,105 416.4,105.1 418.2,105.1 420.1,105.2
B12+: B12.1 J1.1 J1.13 J3.8 | length 250
  Top Layer w2: J3.8 369.21,55.79 371,54 415,54 416.5,52.5 416.5,46.5 417,46
  Layer 1 w1: B12.1@425.763,35.637 427.627,37.5 461.5,37.5 463.5,39.5 463.5,78 462.6,78.9 J1.13
  Layer 2 w1: B12.1 419.127,29 427.627,37.5 461.5,37.5 463.5,39.5 463.5,81.675 461.55,83.625 455.686,83.625 455.1,83.039 J1.1
  other v1: 415.1,20.1 417,20.1 419,20.1 420.811,20.198 412.7,20.4 422.6,20.7 410.9,21.3 424.7,21.6 409.3,22.5 416.1,22.5 418.1,22.5 420,22.6 413.9,22.7 421.9,22.9 426.3,23 412,23.2 423.7,23.3 408.3,23.7 415.4,24.5 417.4,24.5 419.4,24.5 427.6,24.5 410.2,25.1 424.7,25.2 407.2,25.3 428.4,26.5 409.9,27 406.5,27.3 424.9,27.4 428.7,28.6 409.8,28.9 424.9,29.4 406.5,29.8 409.8,30.9 428.3,31 424.8,31.3 406.8,31.9 427.6,33 410,33.1 424.5,33.2 415.4,33.5 417.4,33.5 419.4,33.5 407.6,33.9 426.5,34.6 411.5,34.8 423.2,34.9 413.3,35.2 408.9,35.4 421.3,35.4 415.2,35.5 417.1,35.6 419.1,35.6 425.5,35.9 410.5,36.8 423.9,37.1 412.6,37.7 422.1,37.8 414.5,38 416.4,38.1 418.2,38.1 420.1,38.2
"GND NTC 1": "NTC 1.2" J1.20 | length 312.5
  Top Layer w0.5: 172.789,46.1 172.839,46.05 174.7,46.05 v2(174.75,46) 174.75,49.5 174.25,50 v2(174.25,62.389)
  Layer 2 w0.5: v2(174.25,62.389) 174.25,65.566 178.668,69.984 436.893,69.984 443.001,63.876 447.624,63.876 452.1,59.4 456.6,59.4 J1.20
"GND NTC 2": "NTC 2.1" J1.18 | length 184.4
  Top Layer w0.5: 282.239,78.75 v2(284.35,78.75)
  Layer 2 w0.5: v2(284.35,78.75) 284.35,74.65 286,73 438.142,73 444.25,66.892 450.208,66.892 451.7,65.4 453.7,65.4 456.6,65.4 J1.18
"GND NTC 3": "NTC 3.1" J1.17 | length 45.8
  Top Layer w0.5: 417.239,78.75 v2(419.35,78.75)
  Layer 2 w0.5: v2(419.35,78.75) 419.4,78.7 439.2,78.7 449.5,68.4 453.7,68.4 456.6,68.4 J1.17
"GND NTC 4": "NTC 4.2" J1.19 | length 404.7
  Top Layer w0.5: 64.139,79 v2(66.25,79)
  Layer 2 w0.5: v2(66.25,79) 66.25,73.5 68.258,71.492 437.517,71.492 443.625,65.384 449.016,65.384 452,62.4 453.7,62.4 456.6,62.4 J1.19
"NTC 1": "NTC 1.1" J1.8 | length 325.4
  Top Layer w0.5: 170.986,46.1 170.986,47.457 170.693,47.75 168.293,47.75 168,47.457 168,44.25 168.75,43.5 176.441,43.5 177.5,44.559 177.5,60.25 176,61.75 v2(176,63.012)
  Layer 2 w0.5: v2(176,63.012) 176,66.25 178.98,69.23 436.58,69.23 442.688,63.122 446.912,63.122 452.134,57.9 J1.8
"NTC 2": "NTC 2.2" J1.6 | length 183.3
  Top Layer w0.5: v2(280.3,74.7) 280.33,74.73 280.33,78.719 280.361,78.75
  Layer 2 w0.5: v2(280.3,74.7) 282.754,72.246 437.83,72.246 443.938,66.138 449.662,66.138 451.9,63.9 J1.6
"NTC 3": "NTC 3.2" J1.5 | length 46.8
  Top Layer w0.5: v2(415.2,76.9) 415.211,76.911 415.211,78.75
  Layer 2 w0.5: v2(415.2,76.9) 422.9,76.9 423.946,77.946 438.754,77.946 449.054,67.646 450.52,67.646 451.266,66.9 J1.5
"NTC 4": "NTC 4.1" J1.7 | length 403.7
  Top Layer w0.5: v2(62.3,74.9) 62.318,74.918 62.318,78.982 62.336,79
  Layer 2 w0.5: v2(62.3,74.9) 62.3,73.2 64.762,70.738 437.205,70.738 443.313,64.63 448.404,64.63 452.134,60.9 J1.7
pads on no net: B1.0 B2.0 B3.0 B4.0 B5.0 B6.0 B7.0 B8.0 B9.0 B10.0 B11.0 B12.0 FID1.0 FID2.0 FID3.0 ID1.1 J1.0 J1.16 j2.0 J3.0 J3.4

## Polygon pours and split planes (outlines as drawn)
B4+ on Top Layer "B4+_L01_P009" (solid, pour order 9): 114.35,9 176.35,9 176.35,49 114.35,49
B11+ on Top Layer "B11+_L01_P005" (solid, pour order 5): 368.5,76 430.5,76 430.5,116 368.5,116
B7+ on Top Layer "B7+_L01_P003" (solid, pour order 3): 223.2,76 285.2,76 285.2,116 223.2,116
B1+ on Top Layer "B1+_L01_P000" (solid, pour order 0): 5,76 67,76 67,115.4 5,115.4
B10+ on Top Layer "B10+_L01_P006" (solid, pour order 6): 332.05,9 394.05,9 394.05,49 332.05,49
B2+ on Top Layer "B2+_L01_P010" (solid, pour order 10): 41.7,9 103.7,9 103.7,49 41.7,49
B6+ on Top Layer "B6+_L01_P008" (solid, pour order 8): 186.75,9 248.75,9 248.75,49 186.75,49
B12+ on Top Layer "B12+_L01_P012" (solid, pour order 12): 430.7,9.8 404.7,9.8 404.7,49 430.7,49
B1- on Top Layer "B1-_L01_P011" (solid, pour order 11): 31,9.9 5,9.9 5,49 31,49
B8+ on Top Layer "B8+_L01_P007" (solid, pour order 7): 259.4,9 321.4,9 321.4,49 259.4,49
B9+ on Top Layer "B9+_L01_P004" (solid, pour order 4): 295.85,76 357.85,76 357.85,116 295.85,116
B5+ on Top Layer "B5+_L01_P002" (solid, pour order 2): 150.55,76 212.55,76 212.55,116 150.55,116
B3+ on Top Layer "B3+_L01_P001" (solid, pour order 1): 77.9,76 139.9,76 139.9,116 77.9,116
B4+ on Bottom Layer "B4+_L04_P022" (solid, pour order 22): 114.25,9 176.25,9 176.25,49 114.25,49
B11+ on Bottom Layer "B11+_L04_P018" (solid, pour order 18): 368.4,76 430.4,76 430.4,116 368.4,116
B1+ on Bottom Layer "B1+_L04_P013" (solid, pour order 13): 4.9,76 66.9,76 66.9,115.3 4.9,115.3
B3+ on Bottom Layer "B3+_L04_P014" (solid, pour order 14): 77.8,76 139.8,76 139.8,116 77.8,116
B5+ on Bottom Layer "B5+_L04_P015" (solid, pour order 15): 150.45,76 212.45,76 212.45,116 150.45,116
B7+ on Bottom Layer "B7+_L04_P016" (solid, pour order 16): 223.1,76 285.1,76 285.1,116 223.1,116
B9+ on Bottom Layer "B9+_L04_P017" (solid, pour order 17): 295.75,76 357.75,76 357.75,116 295.75,116
B10+ on Bottom Layer "B10+_L04_P019" (solid, pour order 19): 331.95,9 393.95,9 393.95,49 331.95,49
B8+ on Bottom Layer "B8+_L04_P020" (solid, pour order 20): 259.3,9 321.3,9 321.3,49 259.3,49
B6+ on Bottom Layer "B6+_L04_P021" (solid, pour order 21): 186.65,9 248.65,9 248.65,49 186.65,49
B2+ on Bottom Layer "B2+_L04_P023" (solid, pour order 23): 41.6,9 103.6,9 103.6,49 41.6,49
B1- on Bottom Layer "B1-_L04_P024" (solid, pour order 24): 30.9,9.6 4.9,9.6 4.9,49 30.9,49
B12+ on Bottom Layer "B12+_L04_P025" (solid, pour order 25): 430.6,9.5 404.6,9.5 404.6,49 430.6,49
"GND NTC 3" on Layer 1 "GND_NTC_3_L02_P029" (solid, pour order 29): 424.3,76 408.55,76 408.55,85 424.3,85
"GND NTC 1" on Layer 1 "GND_NTC_1_L02_P030" (solid, pour order 30): 176.375,40 160.625,40 160.625,49 176.375,49
"GND NTC 2" on Layer 1 "GND_NTC_2_L02_P028" (solid, pour order 28): 285.175,76 269.425,76 269.425,85 285.175,85
"GND NTC 4" on Layer 1 "GND_NTC_4_L02_P027" (solid, pour order 27): 67,76 51.25,76 51.25,85 67,85

## Other copper
Top Layer:
  pour cut-out: 421.1,75.8 421.1,81.8 412.1,81.8 412.1,75.8
  pour cut-out: 167.4,48.9 167.4,42.9 176.4,42.9 176.4,48.9
  pour cut-out: 285.35,75.75 285.35,81.75 276.35,81.75 276.35,75.75
  pour cut-out: 67.25,76 67.25,82 58.25,82 58.25,76
Bottom Layer:
  pour cut-out: 416.45,76.05 413.95,76.05 413.95,78.35 416.45,78.35
  pour cut-out: 176.25,44.85 173.55,44.85 173.55,47.15 176.25,47.15
  pour cut-out: 420.6,77.6 418.1,77.6 418.1,79.9 420.6,79.9
  pour cut-out: 285.35,77.6 283,77.6 283,79.9 285.35,79.9
  pour cut-out: 67,77.9 65,77.9 65,80.1 67,80.1

## Silkscreen, mask and mechanical layers (free items; w line width, h text height)
Top Overlay:
  circle w0.5: c434.1,78.9 r0.51
  lines w0.254: 435.385,44.283 450.285,44.283 450.285,80.383 435.385,80.383 435.385,44.283
  lines w0.5: 435.5,47.383 450.3,47.383 ; 435.5,50.383 450.3,50.383 ; 435.5,53.383 450.3,53.383 ; 435.5,56.383 450.3,56.383 ; 435.5,59.383 450.3,59.383 ; 435.5,62.383 450.3,62.383 ; 435.5,65.383 450.3,65.383 ; 435.5,68.383 450.3,68.383 ; 435.5,71.383 450.3,71.383 ; 435.5,74.383 450.3,74.383 ; 435.5,77.383 450.3,77.383 ; 435.5,80.383 450.3,80.383 ; 435.6,44.283 450.4,44.283 ; 443,44.283 443,80.169
  text "B12+" at 437.2,78.4 h1
  text "B12+" at 444.659,78.387 h1
  text "B11+" at 437.259,75.387 h1
  text "B10+" at 444.659,75.287 h1
  text "B9+" at 437.259,72.487 h1
  text "B8+" at 444.659,72.387 h1
  text "B7+" at 437.259,69.487 h1
  text "NC" at 444.559,69.487 h1
  text "NTC3" at 437.221,66.388 h1
  text "G-NTC3" at 444,66.354 h1
  text "NTC2" at 437.1,63.554 h1
  text "G-NTC2" at 443.7,63.454 h1
  text "G-NTC4" at 443.7,60.554 h1
  text "NTC4" at 438.6,60.354 h1
  text "NTC1" at 436.3,57.2 h1
  text "G-NTC1" at 443.7,57.154 h1
  text "B1-" at 437.259,54.387 h1
  text "B1-" at 443.874,54.287 h1
  text "BAT80 BATTERY BOARD  001903 REV 1.2" at 179.7,53.4 h3
  text "BAT 6-12 EXT CHG" at 355.2,53.247 h1
  text "BAT 1-5 EXT CHG" at 137.7,53.1 h1
  text "B2+" at 437.215,51.484 h1
  text "B1+" at 443.974,51.287 h1
  text "B3+" at 437.215,48.484 h1
  text "B4+" at 443.815,48.284 h1
  text "B6+" at 443.915,45.284 h1
  text "B5+" at 437.215,45.184 h1
Mechanical 1:
  lines w0.2: 32.8,8.7 5.45,8.7 cw(c5.876,11.67) 2.906,11.244 2.906,114.106 cw(c5.876,113.68) 5.45,116.65 69.106,116.65 ; 32.806,8.706 ccw(c32.38,11.676) 35.35,11.25 cw(c36.2,11.145) 37.05,11.244 ccw(c40.02,11.67) 39.594,8.7 105.433,8.7 ccw(c105.008,11.67) 107.978,11.244 cw(c108.827,11.139) 109.678,11.238 ccw(c112.647,11.664) 112.222,8.694 178.119,8.694 ; 69.112,116.656 cw(c68.686,113.686) 71.656,114.112 ccw(c72.506,114.211) 73.356,114.106 cw(c76.326,113.68) 75.9,116.65 141.806,116.65 ; 141.812,116.656 cw(c141.386,113.686) 144.356,114.112 ccw(c145.206,114.211) 146.056,114.106 cw(c149.026,113.68) 148.6,116.65 214.406,116.65 ; 178.125,8.7 ccw(c177.699,11.67) 180.669,11.244 cw(c181.519,11.139) 182.369,11.238 ccw(c185.339,11.664) 184.913,8.694 250.619,8.694 ; 214.412,116.656 cw(c213.986,113.686) 216.956,114.112 ccw(c217.806,114.211) 218.656,114.106 cw(c221.626,113.68) 221.2,116.65 286.981,116.65 ; 250.625,8.7 ccw(c250.199,11.67) 253.169,11.244 cw(c254.019,11.139) 254.869,11.238 ccw(c257.839,11.664) 257.413,8.694 323.219,8.694 ; 286.987,116.656 cw(c286.561,113.686) 289.531,114.112 ccw(c290.381,114.211) 291.231,114.106 cw(c294.201,113.68) 293.775,116.65 359.606,116.65 ; 323.225,8.7 ccw(c322.799,11.67) 325.769,11.244 cw(c326.619,11.139) 327.469,11.238 ccw(c330.439,11.664) 330.013,8.694 395.794,8.694 ; 359.612,116.656 cw(c359.186,113.686) 362.156,114.112 ccw(c363.006,114.211) 363.856,114.106 cw(c366.826,113.68) 366.4,116.65 430.45,116.65 ; 395.8,8.7 ccw(c395.374,11.67) 398.344,11.244 cw(c399.194,11.139) 400.044,11.238 ccw(c403.014,11.664) 402.588,8.694 430.406,8.694 ccw(c430.024,11.67) 432.994,11.244 432.994,27.5 cw(c440.2,27.5) 440.2,34.706 461.95,34.7 ccw(c461.524,37.67) 464.494,37.244 ; 430.449,116.644 cw(c430.024,113.674) 432.994,114.099 ; 433,114.1 433,97.2 ccw(c440.2,97.2) 440.2,90 461.955,90 cw(c461.53,87.03) 464.5,87.456 464.5,37.244
Mechanical 2:
  lines w0.254: -5,62.5 483,62.5

## Dimensions
461.95,34.7 to 461.955,90 on Mechanical 1
433,9.7 to 464.5,37.244 on Mechanical 1
2.906,11.244 to 433,9.7 on Mechanical 1
5.45,116.65 to 5.45,8.7 on Mechanical 1

## Text inside footprints (layer, text, board x,y; h text height)
B1: Top Overlay "+" at 21.1,84.5 h8 r180; Top Overlay "-" at 20.1,47 h8 r180
B2: Top Overlay "+" at 51.4,40.5 h8; Top Overlay "-" at 52.4,78 h8
B3: Top Overlay "-" at 92.7,47 h8 r180; Top Overlay "+" at 93.7,84.5 h8 r180
B4: Top Overlay "+" at 124,40.5 h8; Top Overlay "-" at 125,78 h8
B5: Top Overlay "-" at 165.3,47 h8 r180; Top Overlay "+" at 166.3,84.5 h8 r180
B6: Top Overlay "+" at 196.6,40.5 h8; Top Overlay "-" at 197.6,78 h8
B7: Top Overlay "-" at 237.9,47 h8 r180; Top Overlay "+" at 238.9,84.5 h8 r180
B8: Top Overlay "+" at 269.2,40.5 h8; Top Overlay "-" at 270.2,78 h8
B9: Top Overlay "-" at 310.5,47 h8 r180; Top Overlay "+" at 311.5,84.5 h8 r180
B10: Top Overlay "+" at 341.8,40.5 h8; Top Overlay "-" at 342.8,78 h8
B11: Top Overlay "-" at 383.1,47 h8 r180; Top Overlay "+" at 384.1,84.5 h8 r180
B12: Top Overlay "+" at 414.4,40.5 h8; Top Overlay "-" at 415.4,78 h8
ID1: Top Overlay "ID LABEL" at 395,69.7 h1
LB1: Top Layer "1" at 440.3,84 h2.54; Layer 1 "2" at 441.9,84 h2.54; Layer 2 "3" at 444.3,84 h2.54; Bottom Layer "4" at 446.8,84 h2.54